# Altium PCB USBC Charger.PcbDoc
Units mil, origin at the board's own origin, x right, y up, seen from the top; angles counter-clockwise.
Board outline 2500 x 800 mil, 2 copper layers (Top Layer, Bottom Layer); 29 components, 18 nets, 133 pads, 42 vias.
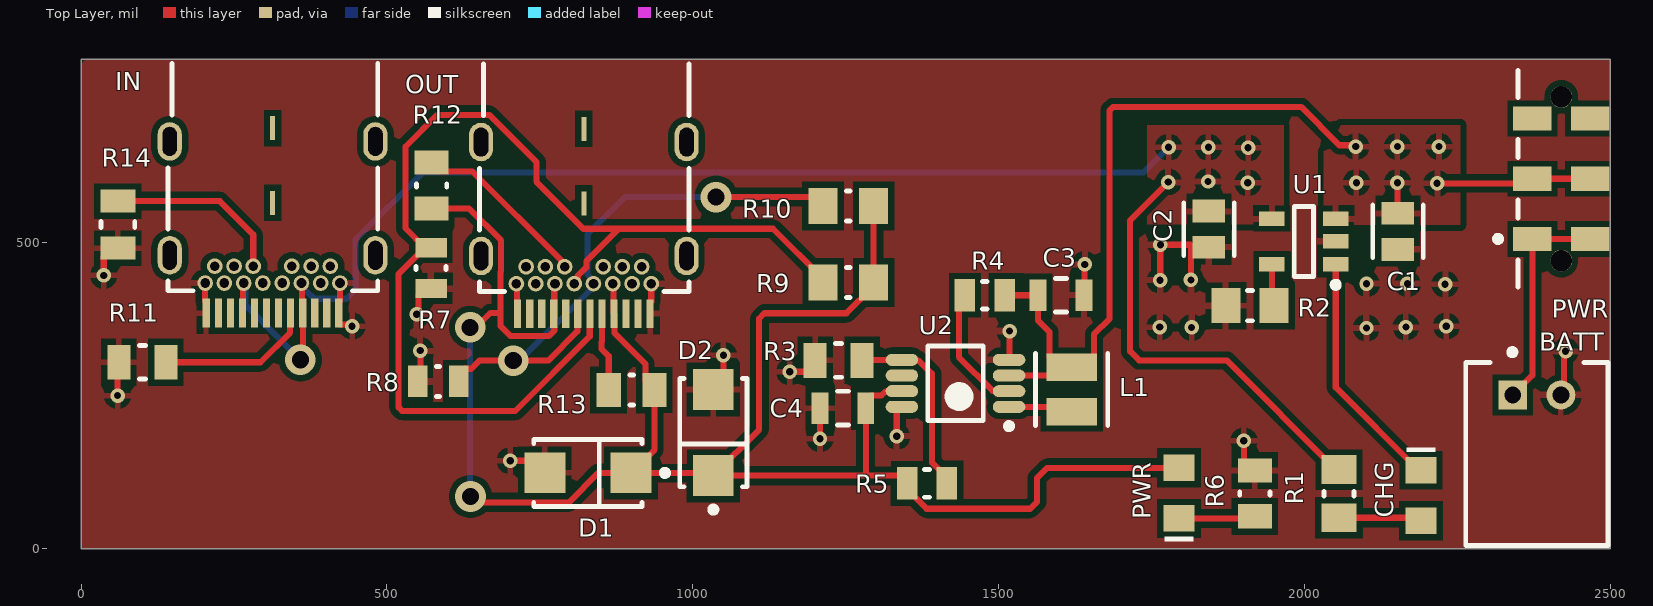
[diagram p0: Top Layer view]
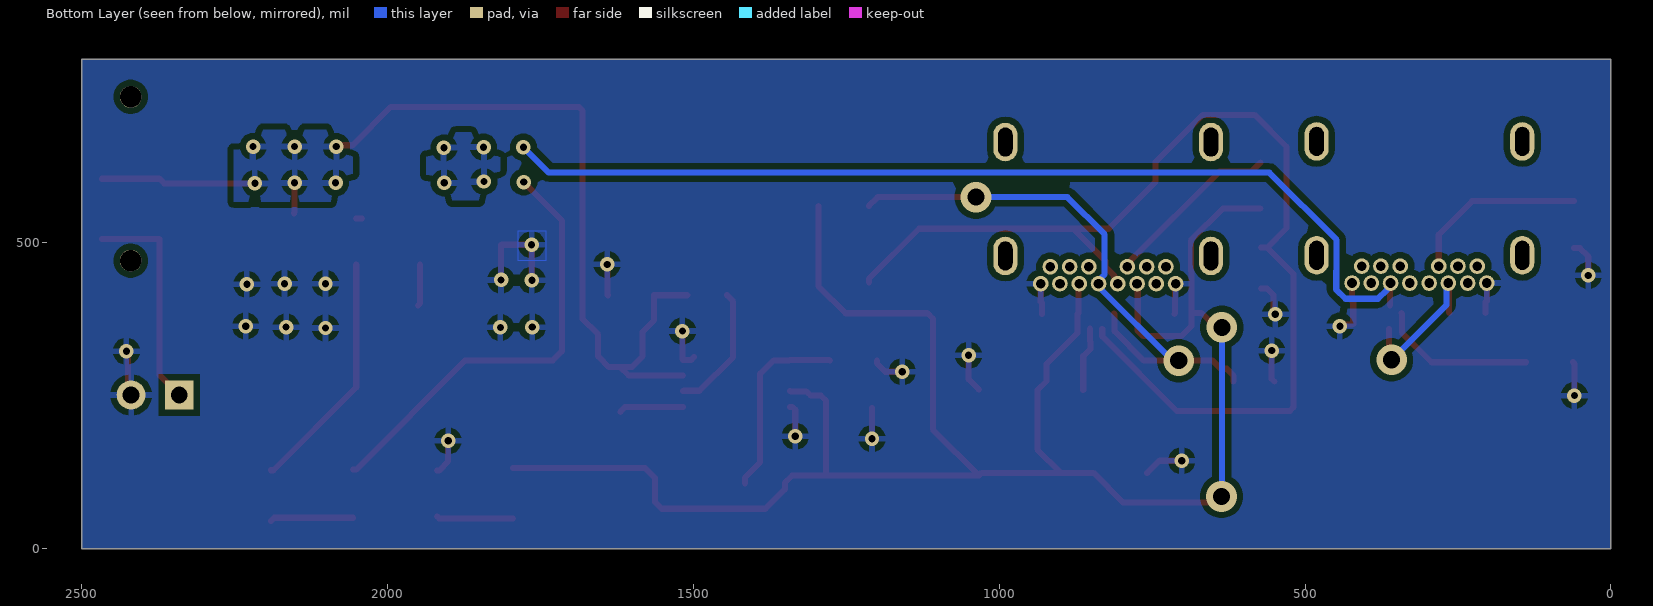
[diagram p1: Bottom Layer view, seen from below]
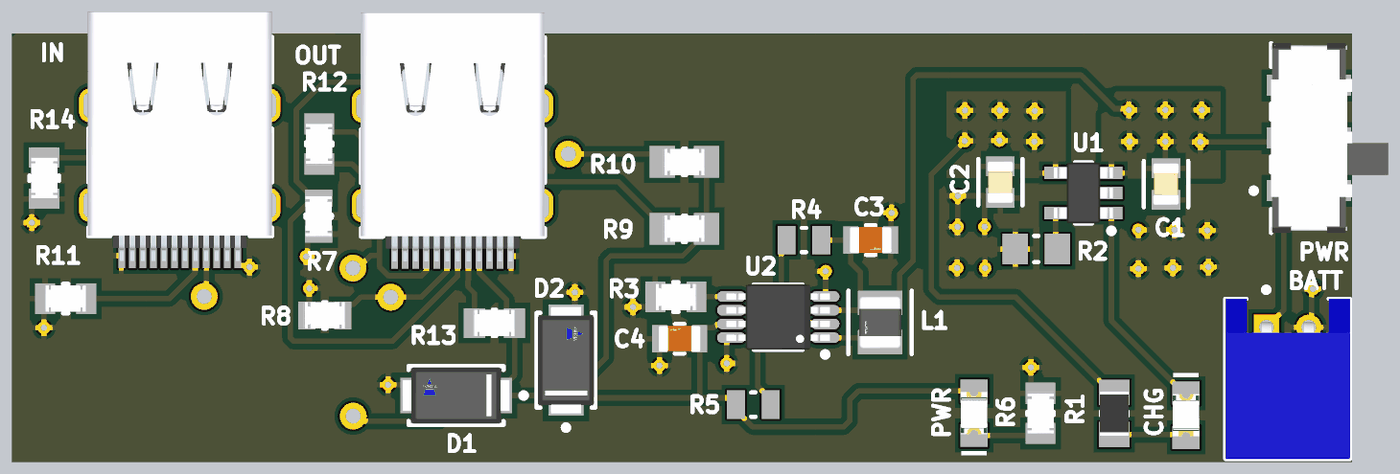
[diagram p2: 3D render of the assembled board from above, using the file's embedded part models]

## Layer stack, top to bottom
Top Solder: solder mask 0.4, Solder Resist, Dk 3.5
Top Layer: signal copper 1.4
Dielectric 1: dielectric 12.6, FR-4, Dk 4.8
Bottom Layer: signal copper 1.4
Bottom Solder: solder mask 0.4, Solder Resist, Dk 3.5

## Board outline
0,0 2500,0 2500,800 0,800

## Design rules (kind name [scope] priority, off if disabled: settings)
Clearance USB_Clearance [IsPad AND (InComponent('IN') OR InComponent('OUT')) vs IsTrack] p1: gap=8 ignorepadtopadclearanceinfootprint=TRUE
Clearance [All] p2: gap=10 ignorepadtopadclearanceinfootprint=TRUE
MinimumSolderMaskSliver [All] p1: minsoldermaskwidth=3.94
PolygonConnect [All] p1: connectstyle=Relief reliefconductorwidth=10 reliefentries=4 polygonreliefangle="90 Angle" airgapwidth=10
RoutingVias [All] p1: holewidth=28 width=50 viastyle="Through Hole" minholewidth=11.81 minwidth=23.62 maxholewidth=28 maxwidth=50
SilkToSolderMaskClearance [IsPad] p1: minsilkscreentomaskgap=5.91 clearancetoexposedcopper=TRUE
SolderMaskExpansion [All] p1: expansion=4 istentingtop=FALSE
SupplyNets "Schematic Supply Nets_1" [InNet('GND')] p1: voltage=0.000
SupplyNets "Schematic Supply Nets" [InNet('+5')] p2: voltage=0.000
Width Width_CC [InNet('CC1_IN') OR InNet('CC2_IN') OR InNet('CC1_OUT') OR InNet('CC2_OUT')] p1: maxlimit=10 minlimit=7 preferedwidth=7
Width [All] p2: maxlimit=10 minlimit=10 preferedwidth=10
Width PowerNets [InNetClass('PowerNets')] p3: maxlimit=50 minlimit=20 preferedwidth=20 minimp=50.000000 maximp=50.000000 favimp=50.000000
28 further rules are at their usual default settings.

## Classes and differential pairs
net class PowerNets: 5VIN +5 NetC1_1 NetJ1_1 NetL1_2
component class "Step-Up DCDC Converter": C3 C4 D1 D2 L1 OUT PWR R3 R4 R5 R6 R7 R8 R9 R10 R12 R13 U2
component class "Charge Controller": BATT C1 C2 CHG IN PWR R1 R2 R11 R14 U1

## Components (designator, comment, footprint, x,y, rotation, side; value= is the part's Value field where it differs from the comment)
BATT "BATT" JST-S2B-PH-K-S_V 2380,155 r0 top (schematic designator J1)
C1 "4.7uF" FP-C0805C475K8PACTU-MFG 2153,519.03 r270 top
C2 "4.7uF" FP-C0805C475K8PACTU-MFG 1844,522.5 r270 top
C3 "22uF" FP-GRM21B-0_15-MFG 1602.1,414.5 r0 top (schematic designator C?)
C4 "22uF" FP-GRM21B-0_15-MFG 1245.5,230 r180 top
CHG "CHG" WL-SMCW_0805_150080xx75000 2190.5,87 r270 top (schematic designator LED1)
D1 "40V/1.5A" FP-95400-MFG 828.5,124 r180 top value=134pF
D2 "40V/1.5A" FP-95400-MFG 1033.5,190 r90 top value=134pF
IN "632723100011" 632723100011 312.89,618.76 r180 top (schematic designator J2)
L1 "2.2uH" FP-LQM2HPN_G0-IPC_C 1619.5,260.5 r270 top
OUT "632723100011" 632723100011 821.89,617.76 r180 top (schematic designator J3)
PWR "PWR" FP-JS102011JAQN-MFG 2420,605 r90 top (schematic designator SW1)
PWR "PWR" WL-SMCW_0805_150080xx75000 1795,91 r90 top (schematic designator LED2)
R1 "1K" RESC2013X60X35ML10T20 2056.5,90.13 r270 top
R2 "2K" RESC2013X60X35ML10T20 1911,397.5 r0 top
R3 "100K" FP-CRCW0805-e3-MFG 1238.5,308 r0 top
R4 "750K" RESC2013X50X30LL20T20 1477.5,414.5 r0 top
R5 "750K" RESC2013X50X30LL20T20 1383,107 r180 top
R6 "4.7K" FP-CRCW0805-e3-IPC_B 1919,90.5 r270 top
R7 "49.9K" FP-CRCW0805-e3-IPC_C 572,459 r90 top
R8 "49.9K" FP-CRCW0805-e3-IPC_C 583.5,273.5 r0 top
R9 "75K" FP-CRCW0805-e3-IPC_A 1254.37,435.5 r0 top
R10 "75K" FP-CRCW0805-e3-IPC_A 1254.37,560.5 r0 top
R11 "5.1K" FP-CRCW0805-e3-MFG 100,305 r0 top
R12 "56K" FP-CRCW0805-e3-IPC_B 573,594 r90 top
R13 "56K" FP-CRCW0805-e3-IPC_B 900,259.5 r180 top
R14 "5.1K" FP-CRCW0805-e3-MFG 60,530 r90 top
U1 "MCP73831" SOT95P280X145-5N 1999,502.5 r180 top
U2 "PAM2401" TSOP65P490X110-8N 1429.5,270.5 r180 top

## Footprints (in the part's own frame and the unit in brackets; to place one, negate y for a bottom-side part, rotate by r counter-clockwise, add the part's x,y. Pads: shape width x height; smd on the part's side, far side on the other; paste and mask are expansions set on the pad)
632723100011 [mm] "USB 3.1 Type C Receptacle Horizontal THR"
  rect 0.3x1.2 smd: A1(-2.75,5.93) A2(-2.25,5.93) A3(-1.75,5.93) A4(-1.25,5.93) A5(-0.75,5.93) A6(-0.25,5.93) A7(0.25,5.93) A8(0.75,5.93) A9(1.25,5.93) A10(1.75,5.93) A11(2.25,5.93) A12(2.75,5.93)
  round 0.65 hole 0.4: B1(2.8,4.68) B2(2.4,3.98) B3(1.6,3.98) B4(1.2,4.68) B5(0.8,3.98) B6(0.4,4.68) B7(-0.4,4.68) B8(-0.8,3.98) B9(-1.2,4.68) B10(-1.6,3.98) B11(-2.4,3.98) B12(-2.8,4.68) Shell(-2,4.68) Shell(2,4.68)
  oval 1x1.6 hole 0.6 slot 1.2 at 90 deg: Shell(-4.27,3.53) Shell(-4.27,-1.2) Shell(4.27,3.53) Shell(4.27,-1.2)
  rect 0.2x1 smd: Shell(0,1.35) Shell(0,-1.75)
  silkscreen extent -4.37,-4.45 4.34,5, body extent -4.37,-5.62 4.37,6.2, height 3.05
FP-95400-MFG [mm]
  rect 1.7x1.68 smd paste+0 mask+0: 1(-1.79,0) 2(1.79,0)
  silkscreen extent -3.33,-1.4 2.25,1.4, body extent -2.74,-1.5 2.74,1.5, height 0.25
FP-C0805C475K8PACTU-MFG [mm]
  rect 0.95x1.35 smd paste+0 mask+0: 1(-0.75,0) 2(0.75,0)
  silkscreen extent -1.1,-1.05 1.1,1.05, body extent -1.4,-0.85 1.4,0.85, height 0.25
FP-CRCW0805-e3-IPC_A [mil]
  rect 47.5x59.38 smd paste+0 mask+0: 1(-41.37,0) 2(41.37,0)
  silkscreen extent -3,-25 3,25, body extent -85,-49 85,49, height 10
FP-CRCW0805-e3-IPC_B [mil]
  rect 39.63x55.44 smd paste+0 mask+0: 1(-37.44,0) 2(37.44,0)
  silkscreen extent -3,-25 3,25, body extent -67,-38 67,38, height 10
FP-CRCW0805-e3-IPC_C [mil]
  rect 31.75x51.5 smd paste+0 mask+0: 1(-33.5,0) 2(33.5,0)
  silkscreen extent -3,-25 3,25, body extent -53,-31 53,31, height 10
FP-CRCW0805-e3-MFG [mm]
  rect 0.95x1.45 smd paste+0 mask+0: 1(-0.975,0) 2(0.975,0)
  silkscreen extent -0.13,-0.7 0.13,0.7, body extent -1.55,-0.82 1.55,0.82, height 0.25
FP-GRM21B-0_15-MFG [mm]
  rect 0.7x1.3 smd paste+0 mask+0: 1(-0.95,0) 2(0.95,0)
  silkscreen extent -0.23,-0.7 0.23,0.7, body extent -1.4,-0.8 1.4,0.8, height 0.25
FP-JS102011JAQN-MFG [mm]
  rect 1x1.6 smd paste+0 mask+0: 1(-2.5,-1.2) 1(-2.5,1.2) 2(0,1.2) 2(0,-1.2) 3(2.5,-1.2) 3(2.5,1.2)
  round 0.9 hole 0.9 unplated paste-2539.97 mask+0: ""(-3.4,0) ""(3.4,0)
  silkscreen extent -4.5,1.8 4.5,2.75, body extent -4.6,-3.9 4.6,2.1, height 0.25
FP-LQM2HPN_G0-IPC_C [mil]
  rect 45.47x82.92 smd paste+0 mask+0: 1(-36.44,0) 2(36.44,0)
  silkscreen extent -59,-59 59,59, body extent -63,-47 63,47, height 10
JST-S2B-PH-K-S_V [mm] "THD, 2-Leads, Body 7.6x5.9mm, Pitch 2mm"
  rect 1.2x1.2 hole 0.7: 1(-1,2.45)
  round 1.2 hole 0.7: 2(1,2.45)
  silkscreen extent -2.95,-3.8 2.95,4.35, body extent -2.95,-3.8 2.95,3.8, height 4.8
RESC2013X50X30LL20T20 [mm] "Chip Resistor, 2-Leads, Body 2.00x1.25mm, IPC High Density"
  rect 0.85x1.35 smd: 1(-0.825,0) 2(0.825,0)
  silkscreen extent -0.1,-0.58 0.1,0.58, body extent -1.1,-0.72 1.1,0.72, height 0.5
RESC2013X60X35ML10T20 [mm] "Chip Resistor, 2-Leads, Body 2.1x1.35mm, IPC Low Density"
  rect 1.2x1.45 smd: 1(-1,0) 2(1,0)
  silkscreen extent -0.1,-0.63 0.1,0.63, body extent -1.05,-0.68 1.05,0.67, height 0.6
SOT95P280X145-5N [mm] "SOT23, 5-Leads, Body 2.90x2.80mm, Pitch 0.95mm, IPC Medium Density"
  rect 1.05x0.6 smd: 1(-1.325,0.95) 2(-1.325,0) 3(-1.325,-0.95) 4(1.325,-0.95) 5(1.325,0.95)
  silkscreen extent -1.45,-1.45 0.4,1.92, body extent -1.4,-1.45 1.4,1.45, height 1.45
TSOP65P490X110-8N [mm] "TSOP, 8-Leads, Body 3.00x3.00mm, Pitch 0.65mm, IPC Medium Density"
  oval 1.35x0.5 smd: 1(-2.225,0.975) 2(-2.225,0.325) 3(-2.225,-0.325) 4(-2.225,-0.975) 5(2.225,-0.975) 6(2.225,-0.325) 7(2.225,0.325) 8(2.225,0.975)
  silkscreen extent -2.35,-1.55 1.15,1.9, body extent -2.45,-1.55 2.45,1.55, height 1.1
WL-SMCW_0805_150080xx75000 [mm] "SMD Mono-color Chip LED, body 2.0x1.25mm"
  rect 1.1x1.3 smd: 1(-1.05,0) 2(1.05,0)
  silkscreen extent -2,-0.6 -1.8,0.6, body extent -1,-0.63 1,0.62, height 0.7

## Part data
BATT: library part CMP-1755-00004-1, "Male Header, Pitch 2 mm, 1 x 2 Position, Height 4.8 mm, Tail Length 3.4 mm, -25 to 85 degC, RoHS, Bulk", Capacitance="10 uF", Case\Package=Radial, Max Operating Temperature="85 degC", Min Operating Temperature="-40 degC", Package Quantity=200, Tolerance=20%, Voltage Rating="50 V", ComponentLink1Description=Datasheet, ComponentLink1URL=http://www.jst-mfg.com/product/pdf/eng/ePH.pdf, DatasheetVersion=Dec-12, Diameter="5 mm", Height="11 mm", Lead Pitch="2 mm", Length="11 mm", Mount="Through Hole", PackageDescription="Male Header, Pitch 2 mm, 1 x 2 Position, Height 4.8 mm, Tail Length 3.4 mm", PackageReference=S2B-PH-K-S, Packaging=Bulk, Pins=2, Radiation Hardening=No, REACH SVHC="No SVHC", RoHSCompliant=true, Voltage Rating (DC)="50 V"
C1 C2: library part CMP-2007-01007-2, "CAP CER 4.7UF 10V X5R 0805", Case Code (Imperial)=0805, Case Code (Metric)=2012, Dielectric=X5R, Dielectric Material=Ceramic, Max Operating Temperature=85°C, Min Operating Temperature=-55°C, Package Quantity=1, Tolerance=10%, Voltage=10V, Capacitance=4.7uF, Case/Package=0805, Construction=Flat, Depth=1.25mm, Dissipation Factor=5%, Height=1.25mm, Lead Free="Lead Free", Lead Pitch=0.75mm, Length=2mm, Mount="Surface Mount", Number of Pins=2, Packaging="Tape and Reel", Radiation Hardening=No, REACH SVHC="No SVHC", RoHS Compliant=Yes, Series=C, Termination=SMD/SMT, Thickness=0.055inch, Voltage Rating=10V, Voltage Rating (DC)=10V, Width=1.2mm
C3 C4: library part CMP-2007-03385-2, "Chip Multilayer Ceramic Capacitors for General Purpose, 0805, 22uF, X5R, 15%, 20%, 6.3V", Case Code (Imperial)=0805, Case Code (Metric)=2012, Dielectric=X5R, Max Operating Temperature=85°C, Min Operating Temperature=-55°C, Package Quantity=1, Tolerance=20%, Voltage=6.3V, Capacitance=22uF, Case/Package=0805, Depth=1.25mm, Height=1.25mm, Lead Free="Lead Free", Length=2mm, Material=Ceramic, Mount="Surface Mount", Packaging="Tape and Reel", Radiation Hardening=No, REACH SVHC="No SVHC", Termination=SMD/SMT, Thickness=0.053inch, Voltage Rating=6.3V, Voltage Rating (DC)=6.3V, Width=0.049inch
CHG: library part CMP-1426-00011-4, "LED Uni-Color Red 630nm 2-Pin Chip 0805(2012Metric) T/R", Case Code (Imperial)=0805, Case Code (Metric)=2012, Color=Red, Forward Current=100mA, Forward Voltage=2V, Manufacturer Lifecycle Status=ACTIVE, Manufacturer Package Identifier="0805 (2012 metric)", Max Junction Temperature (Tj)=95°C, Max Operating Temperature=85°C, Max Reverse Voltage (DC)=5V, Min Operating Temperature=-40°C, Power Dissipation=72mW, Test Current=20mA, Case/Package=0805, Dominant Wavelength=625nm, Height=700µm, Length=2mm, Lens Style="Clear, Rectangular", Lifecycle Status=Production, Luminous Intensity=150mcd, Mount="Surface Mount", Packaging="Tape and Reel", Peak Wavelength=630nm, REACH SVHC=Unknown, RoHS=Compliant, Viewing Angle=140°, Wavelength=625nm, Width=1.25mm, YEOL="1 = Estimated lifetime > 10 years"
D1 D2: library part CMP-02539-000025-1, "DIODE SCHOTTKY 40V 1.5A SMA", Capacitance=134pF, Forward Current=1.5A, Manufacturer=Vishay, Manufacturer Part Number=VS-15MQ040NTRPBF, Max Junction Temp=+150°C, Max Repetitive Reverse Voltage=40V, Max Surge Forward Current=140A, Package=95400, Peak Reverse Current=0.5mA, Temperature="-40°C to +150°C", Temperature Range Low=-40°C, Automotive=No, Category=Diode, ComponentLink2Description=Datasheet, ComponentLink2URL=http://www.vishay.com/docs/94141/vs-15mq040ntrpbf.pdf, Device Class L1="Discrete Semiconductors", Device Class L2=Diodes, Device Class L3="Schottky Diodes", Digikey Description="DIODE SCHOTTKY 40V 1.5A SMA", Footprint Url=http://www.vishay.com/docs/95400/sma.pdf, Height=2.29mm, Lead Free=Yes, Mouser Description="Schottky Diodes & Rectifiers 2.1 Amp 40 Volt", Octopart=https://octopart.com/vs-15mq040ntrpbf-vishay-44340959, Reverse Voltage=40V, RoHS=TRUE, Standoff Height=0mm, Temperature Range High=+150°C
IN OUT: library part CMP-1502-03213-4, "USB Connector, 24 Contact(s), Female, Right Angle, Solder and Surface Mount Terminal, Receptacle", Contact Resistance=30mΩ, Current Rating=5A, Insulation Resistance=1GΩ, Max Operating Temperature=105°C, Min Operating Temperature=-40°C, Voltage Rating=20V, Connector Type=USB, Contact Material="Gold, Nickel", Gender=Receptacle, Height=3.16mm, Mount="Surface Mount, Through Hole", Number of Contacts=24, Number of Pins=24, Orientation=Horizontal, Packaging="Tape and Reel", Pin Length=1.5mm, RoHS=Compliant, USB Standard="USB 3.1"
L1: library part CMP-06042-017002-1, "Multilayer Type Inductor for Power Lines, 1008 (2520), 2.2μH, 20%, 0.225Ω, 1100mA", Case/Package=1008, Current Rating=1.1A, DC Resistance (DCR)=225mR, Max Operating Temperature=85°C, Min Operating Temperature=-40°C, Package Quantity=3000, Self Resonant Frequency=40MHz, Test Frequency=1MHz, Tolerance=20%, Height - Seated (Max)=0.039inch, Inductance=2.2uH, Length=0.098inch, Mount="Surface Mount", Packaging="Tape and Reel", RoHS Compliant=Yes, Shielding=Shielded, Width=0.079inch
PWR: library part CMP-10038-000001-1, "SWITCH SLIDE SPDT 300MA 6V", Contact Current Rating=300mA, Contact Resistance=70mΩ, Manufacturer=C&K, Manufacturer Part Number=JS102011JAQN, Temperature="-40°C to +85°C", Temperature Range High=+85°C, Temperature Range Low=-40°C, Voltage Rating Dc=6V, Automotive=No, Category=Switch, ComponentLink2Description=Datasheet, ComponentLink2URL=https://www.ckswitches.com/media/1422/js.pdf, Device Class L1=Electromechanical, Device Class L2=Switches, Device Class L3="Slide Switches", Digikey Description="SWITCH SLIDE SPDT 300MA 6V", Electromechanical Life=5000Cycles, Height=3.5mm, Lead Free=Yes, Mount="Surface Mount", Mouser Description="JS Series Sub-Miniature Slide Switch SPDT Right-Angle SMT", Octopart=https://octopart.com/js102011jaqn-c%26k+components-74831566, Package=JS102011JAQN, RoHS=TRUE, Throw Configuration=SPDT
PWR: library part CMP-1426-00008-8, "Led, Blue, 470 Nm, 3.2 V, 30 Ma, 145 Mcd Rohs Compliant: Yes", Case Code (Imperial)=0805, Case Code (Metric)=2012, Color=Blue, Forward Current=100mA, Forward Voltage=3.2V, Manufacturer Lifecycle Status=ACTIVE, Manufacturer Package Identifier="0805 (2012 metric)", Max Junction Temperature (Tj)=95°C, Max Operating Temperature=85°C, Max Reverse Voltage (DC)=5V, Min Operating Temperature=-40°C, Power Dissipation=105mW, Test Current=20mA, Case/Package=0805, Dominant Wavelength=470nm, Height=700µm, Lead Free="Lead Free", Length=2mm, Lens Style="Clear, Rectangular", Lifecycle Status=Production, Luminous Intensity=145mcd, Mount="Surface Mount", Packaging="Tape and Reel", Peak Wavelength=465nm, REACH SVHC=Unknown, Reverse Voltage=5V, RoHS=Compliant, Viewing Angle=140°, Wavelength=470nm, Width=1.25mm, YEOL="1 = Estimated lifetime > 10 years"
R1: library part CMP-2100-03671-1, "Chip Resistor, 1 KOhm, +/- 1%, 125 mW, -55 to 155 degC, 0805 (2012 Metric), RoHS, Tape and Reel", Case Code (Imperial)=0805, Case Code (Metric)=2012, Manufacturer=Yageo, Max Operating Temperature=155degC, Max Power Dissipation=125mW, Min Operating Temperature=-55degC, Package Description="2-Pin Surface Mounted Device, Body 2 x 1.25 mm", Package Quantity=1, Resistance=1KOhm, Temperature Coefficient=100ppm/degreesC, Tolerance=1%, Voltage Rating=150V, Case/Package=0805, Composition=ThickFilm, Datasheet URL=http://www.yageo.com/NewPortal/yageodocoutput?fileName=/pdf/R-Chip/PYu-RC_Group_51_RoHS_L_5.pdf, Datasheet Version="Rev. 5, 10/2016", Depth=1.25mm, Height=0.024inch, Lead Free=LeadFree, Length=0.079inch, Manufacturer URL=http://www.yageo.com/, Military Standard=Not, Number of Pins=2, Number of Terminations=2, Package Reference=0805, Packaging=TapeandReel, Power Rating=125mW, REACH SVHC=Unknown, RoHSCompliant=true, Termination=SMD/SMT, Voltage Rating (DC)=150V, Width=0.049inch
R2: library part CMP-2001-01361-1, Manufacturer=Yageo, Part Number=RC0805JR-072KL
R3: library part CMP-2001-04899-2, "RES Thick Film, 100kΩ, 1%, 0.125W, 100ppm/°C, 0805", Case Code (Imperial)=0805, Case Code (Metric)=2012, Max Operating Temperature=155°C, Min Operating Temperature=-55°C, Package Quantity=5000, Power Rating=125mW, Resistance=100kR, Temperature Coefficient=100ppm/°C, Tolerance=1%, Voltage Rating=150V, Case/Package=0805, Composition="Thick Film", Contact Plating=Tin, Depth=1.25mm, Height=0.45mm, Lead Free="Lead Free", Length=2mm, Military Standard=Not, Mount="Surface Mount", Number of Pins=2, Packaging="Tape and Reel", Radiation Hardening=No, Termination=SMD/SMT, Voltage Rating (DC)=150V, Weight=0.000194oz, Width=1.25mm
R4 R5: library part CMP-2001-04102-1, Manufacturer="Vishay Dale", Part Number=CRCW0805750KFKEA
R6: library part CMP-2100-03615-2, "RES Thick Film, 4.7kΩ, 1%, 0.125W, 100ppm/°C, 0805", Case Code (Imperial)=0805, Case Code (Metric)=2012, Max Operating Temperature=155°C, Max Power Dissipation=125mW, Min Operating Temperature=-55°C, Package Quantity=10, Resistance=4.7kR, Temperature Coefficient=100ppm/°C, Tolerance=1%, Voltage Rating=150V, Case/Package=0805, Composition="Thick Film", Contact Plating=Tin, Depth=1.25mm, Features="Automotive AEC-Q200", Height=0.45mm, Lead Free="Lead Free", Length=2mm, Military Standard=Not, Number of Terminations=2, Packaging="Tape and Reel", Power Rating=125mW, Radiation Hardening=No, Termination=SMD/SMT, Voltage Rating (DC)=150V, Weight=0.000194oz, Width=1.25mm
R7 R8: library part CMP-2001-03952-2, "RES Thick Film, 49.9kΩ, 1%, 0.125W, 100ppm/°C, 0805", Case Code (Imperial)=0805, Case Code (Metric)=2012, Max Operating Temperature=155°C, Max Power Dissipation=125mW, Min Operating Temperature=-55°C, Package Quantity=10, Resistance=49.9kR, Temperature Coefficient=100ppm/°C, Tolerance=1%, Voltage Rating=150V, Case/Package=0805, Composition="Thick Film", Contact Plating=Tin, Depth=1.25mm, Features="Automotive AEC-Q200", Height=0.45mm, Lead Free="Lead Free", Length=2mm, Military Standard=Not, Mount="Surface Mount", Number of Terminations=2, Packaging="Tape and Reel", Power Rating=125mW, Radiation Hardening=No, Termination=SMD/SMT, Voltage Rating (DC)=150V, Weight=0.000194oz, Width=0.049inch
R9 R10: library part CMP-2001-04106-2, "RES Thick Film, 75kΩ, 1%, 0.125W, 100ppm/°C, 0805", Case Code (Imperial)=0805, Case Code (Metric)=2012, Max Operating Temperature=155°C, Max Power Dissipation=125mW, Min Operating Temperature=-55°C, Package Quantity=10, Resistance=75kR, Resistance Tolerance=1%, Resistor Type="Thick Film", Temperature Coefficient=100ppm/°C, Voltage Rating=150V, Case/Package=0805, Construction=Rectangular, Contact Plating=Tin, Depth=1.25mm, Features="Automotive AEC-Q200", Height=0.45mm, Lead Free="Lead Free", Length=2mm, Military Standard=Not, Mount="Surface Mount", Number of Pins=2, Number of Terminations=2, Packaging="Tape and Reel", Power Rating=125mW, Radiation Hardening=No, RoHS Compliant=Yes, Series=CRCW, Technology="THICK FILM", Termination=SMD/SMT, Tolerance=1%, Voltage Rating (DC)=150V, Weight=0.000194oz, Width=0.049inch, Working Voltage=150V
R11 R14: library part CMP-2001-04024-2, "RES Thick Film, 5.1kΩ, 1%, 0.125W, 100ppm/°C, 0805", Case Code (Imperial)=0805, Case Code (Metric)=2012, Max Operating Temperature=155°C, Max Power Dissipation=125mW, Min Operating Temperature=-55°C, Package Quantity=10, Resistance=5.1kR, Temperature Coefficient=100ppm/°C, Tolerance=1%, Voltage Rating=150V, Case/Package=0805, Composition="Thick Film", Contact Plating=Tin, Depth=1.25mm, Features="Automotive AEC-Q200", Height=0.45mm, Lead Free="Lead Free", Length=2mm, Military Standard=Not, Mount="Surface Mount", Number of Terminations=2, Packaging="Tape and Reel", Power Rating=125mW, Radiation Hardening=No, Termination=SMD/SMT, Voltage Rating (DC)=150V, Weight=0.000194oz, Width=0.049inch
R12 R13: library part CMP-2001-04015-2, "RES Thick Film, 56kΩ, 1%, 0.125W, 100ppm/°C, 0805", Case Code (Imperial)=0805, Case Code (Metric)=2012, Max Operating Temperature=155°C, Max Power Dissipation=125mW, Min Operating Temperature=-55°C, Package Quantity=10, Resistance=56kR, Temperature Coefficient=100ppm/°C, Tolerance=1%, Voltage Rating=150V, Case/Package=0805, Composition="Thick Film", Contact Plating=Tin, Depth=1.25mm, Features="Automotive AEC-Q200", Height=0.45mm, Lead Free="Lead Free", Length=2mm, Military Standard=Not, Mount="Surface Mount", Number of Pins=2, Number of Terminations=2, Packaging="Tape and Reel", Power Rating=125mW, Radiation Hardening=No, Termination=SMD/SMT, Voltage Rating (DC)=150V, Weight=0.000194oz, Width=1.25mm
U1: "MCP73831 Series Single-Cell Li-Ion/Li-Polymer Battery Charge Controller SOT-23-5", Ambient Temperature Range High=85°C, Case/Package=SOT-23, Drain to Source Resistance=350mΩ, Manufacturer=Microchip, Manufacturer Lifecycle Status=REL, Manufacturer Part Number=MCP73831T-2ACI/OT, Max Charge Current=500mA, Max Junction Temperature (Tj)=125°C, Max Output Voltage=4.5V, Max Power Dissipation=1.54W, Max Supply Voltage=6V, Min Operating Temperature=-40°C, Min Output Voltage=4.168V, Min Supply Voltage=3.75V, Output Voltage=4.2V, Voltage Rating=4.534V, Category="Battery Management", ComponentLink1Description=https://datasheet.octopart.com:443/MCP73831T-2ACI-OT-Microchip-datasheet-8814540.pdf?src-supplier=element14+APAC, ComponentLink1URL=https://datasheet.octopart.com:443/MCP73831T-2ACI-OT-Microchip-datasheet-8814540.pdf?src-supplier=element14+APAC, ComponentLink2Description=https://datasheet.octopart.com:443/MCP73831T-2ACI-OT-Microchip-datasheet-145017548.pdf?src-supplier=Microchip, ComponentLink2URL=https://datasheet.octopart.com:443/MCP73831T-2ACI-OT-Microchip-datasheet-145017548.pdf?src-supplier=Microchip, ComponentLink3Description=https://datasheet.octopart.com:443/MCP73831T-2ACI-OT-Microchip-datasheet-34193478.pdf?src-supplier=Farnell, ComponentLink3URL=https://datasheet.octopart.com:443/MCP73831T-2ACI-OT-Microchip-datasheet-34193478.pdf?src-supplier=Farnell, ComponentLink4Description=https://datasheet.octopart.com:443/MCP73831T-2ACI-OT-Microchip-datasheet-16123459.pdf?src-supplier=LKR, ComponentLink4URL=https://datasheet.octopart.com:443/MCP73831T-2ACI-OT-Microchip-datasheet-16123459.pdf?src-supplier=LKR, ComponentLink5Description=https://datasheet.octopart.com:443/MCP73831T-2ACI-OT-Microchip-datasheet-142675560.pdf?src-supplier=TME, ComponentLink5URL=https://datasheet.octopart.com:443/MCP73831T-2ACI-OT-Microchip-datasheet-142675560.pdf?src-supplier=TME, ComponentLink6Description=https://datasheet.octopart.com:443/MCP73831T-2ACI-OT-Microchip-datasheet-158592061.pdf?src-supplier=SHENGYU+ELECTRONICS, ComponentLink6URL=https://datasheet.octopart.com:443/MCP73831T-2ACI-OT-Microchip-datasheet-158592061.pdf?src-supplier=SHENGYU+ELECTRONICS, ComponentLink7Description=https://datasheet.octopart.com/MCP73831T-2ACI-OT-Microchip-datasheet-16593012.pdf, ComponentLink7URL=https://datasheet.octopart.com/MCP73831T-2ACI-OT-Microchip-datasheet-16593012.pdf, ComponentLink8Description=https://datasheet.octopart.com:443/MCP73831T-2ACI-OT-Microchip-datasheet-7127743.pdf?src-supplier=Newark, ComponentLink8URL=https://datasheet.octopart.com:443/MCP73831T-2ACI-OT-Microchip-datasheet-7127743.pdf?src-supplier=Newark, ComponentLink9Description=https://datasheet.octopart.com:443/MCP73831T-2ACIOT-Microchip-datasheet-39874.pdf?src-supplier=RS+(Formerly+Allied+Electronics), ComponentLink9URL=https://datasheet.octopart.com:443/MCP73831T-2ACIOT-Microchip-datasheet-39874.pdf?src-supplier=RS+(Formerly+Allied+Electronics), ComponentLink10Description=http://sigma.octopart.com:80/188449423/materials_sheet/Microchip-MCP73831T-2ACI-OT.pdf?src-supplier=Compliance+Statements, ComponentLink10URL=http://sigma.octopart.com:80/188449423/materials_sheet/Microchip-MCP73831T-2ACI-OT.pdf?src-supplier=Compliance+Statements, ComponentLink11Description=http://sigma.octopart.com:80/192856963/materials_sheet/Microchip-MCP73831T-2ACI-OT.pdf?src-supplier=Compliance+Statements, ComponentLink11URL=http://sigma.octopart.com:80/192856963/materials_sheet/Microchip-MCP73831T-2ACI-OT.pdf?src-supplier=Compliance+Statements, ComponentLink12Description=http://sigma.octopart.com:80/rohs_statement/Microchip-company-71.pdf?src-supplier=Compliance+Statements, ComponentLink12URL=http://sigma.octopart.com:80/rohs_statement/Microchip-company-71.pdf?src-supplier=Compliance+Statements, ComponentLink13Description=http://sigma.octopart.com:80/reach_statement/Microchip-company-70.pdf?src-supplier=Compliance+Statements, ComponentLink13URL=http://sigma.octopart.com:80/reach_statement/Microchip-company-70.pdf?src-supplier=Compliance+Statements, ComponentLink14Description=http://sigma.octopart.com:80/conflict_mineral_statement/Microchip-company-69.pdf?src-supplier=Compliance+Statements, ComponentLink14URL=http://sigma.octopart.com:80/conflict_mineral_statement/Microchip-company-69.pdf?src-supplier=Compliance+Statements, ComponentLink15Description=http://sigma.octopart.com:80/conflict_mineral_statement/Microchip-company-68.pdf?src-supplier=Compliance+Statements, ComponentLink15URL=http://sigma.octopart.com:80/conflict_mineral_statement/Microchip-company-68.pdf?src-supplier=Compliance+Statements, Contact Plating=Tin, Country of Assembly=Thailand, Country of Fabrication="United States of America", Country of Origin=Thailand, Export Control Classification Number (ECCN) Code=EAR99, Harmonized Tariff Schedule (HTS) Code=8542.39.0060, Height=1.45mm, HS Code=8542.39.0090, Introduction Date=2005-11-03, Length=3.0988mm, Lifecycle Status=Production, Max Operating Temperature=85°C, Mounting Technology="Surface Mount", Nominal Supply Voltage=6V, Number of Cells=1, Number of Channels=1, Number of Outputs=1, Output Current=500mA, Packaging="Cut Tape", Pins=5, Pricing="3000=0.66216, 6000=0.64901, 12000=0.63969, 24000=0.63063, 48000=0.6125 (USD)", Projected EOL Date=2034-11-03, Radiation Hardening=No, REACH SVHC=Unaffected, RoHS=Compliant, Schedule B="8542390000, 8542390000|8542390000|8542390000|8542390000|8542390000", Stock=21000, Supplier=Avnet, Supplier Part Number=MCP73831T-2ACI/OT, Termination=SMD/SMT, Weight=200.998119mg, Width=1.8034mm
U2: "1.0MHz STEP-UP DC-DC CONVERTER"

## Via types
v1: diameter 23.62, hole 11.81, Top Layer to Bottom Layer, 37 vias
v2: diameter 50, hole 28, Top Layer to Bottom Layer, 5 vias

## Nets (pads, with @x,y where several pads share a name; then routed paths per layer and width w, separated by ;. In a path a pad name is that pad's centre, name@x,y a point inside that pad or via, vN(x,y) a via of type N, cw(c..) or ccw(c..) an arc to the next point about the centre after c; other vN are vias at no path point)
5VIN: C2.1 IN.A4 IN.A9 IN.B4 IN.B9 R1.1 U1.4 | length 2610.4
  Top Layer w10: IN.A9 264.46,386.07 264.46,433.31 IN.B4 ; v2(358.5,309) 362.88,313.38 362.88,359.5 ; IN.B9 361.32,433.32 IN.A4@361.32,397.5 ; v1(1777.5,599.5) 1715,537 1715,323 1730,308 1873.08,308 2051.58,129.5 R1.1
  Bottom Layer w10: IN.B4 268.63,431.52 268.63,398.87 v2(358.5,309) ; IN.B9 360.13,430.29 365.83,424.58 365.83,423.82 380.95,408.71 433.81,408.71 448.92,423.82 448.92,453.82 448.31,454.43 448.31,505.13 558.19,615 1736.5,615 v1(1778,656.5)
  other v1: 1907.5,598.5 1842.5,600.5 1843,656.5 1908,655.5
+5: C4.1 D1.1 D2.1 OUT.A4 OUT.A9 OUT.B4 OUT.B9 PWR.2@1795,132.34 R5.2 R9.2 R10.2 R12.1 R13.1 U2.7 | length 3220.9
  Top Layer w10: R12.1 634.03,556.56 686.46,504.13 686.46,453.43 685.86,452.82 685.86,385.5 ; v2(636,362) 645.57,362 669.07,385.5 685.86,385.5 ; v2(636.5,85.5) 647.32,85.5 656.89,75.93 797.71,75.93 845.78,124 D1.1 D1.1@899.37,124 ; OUT.B4 773.46,432.31 773.46,356.84 764.28,347.67 702.33,347.67 685.86,364.14 685.86,385.5 ; OUT.B9 870.32,432.32 870.32,385.07 OUT.A4 871.88,383.51 871.88,352.96 922.62,302.22 922.62,274.31 R13.1 937.44,162.07 D1.1@899.37,124 ; R10.2 R9.2 1295.74,429.56 1251.22,385.03 1117.03,385.03 1108.5,376.5 1108.5,194.92 1033.5,119.92 D2.1 ; U2.7 1341.15,256.96 1314.88,256.96 1308.51,250.59 1291.68,250.59 1282.9,241.81 C4.1 1282.9,121.12 1284.5,119.52 ; PWR.2@1795,132.34 1579.43,132.34 1563.02,115.93 1563.02,76.86 1551.58,65.43 1382.25,65.43 1350.52,97.16 R5.2 1350.52,107.79 1338.79,119.52 1284.5,119.52 ; D1.1@899.37,124 1029.02,124 D2.1 ; D2.1 1284.5,119.52
  Bottom Layer w10: v2(636,362) 636,95.5 636.5,95 v2(636.5,85.5)
CC1_IN: IN.A5 R11.2 | length 255.5
  Top Layer w10: R11.2 293.18,305 341.64,353.46 341.64,384.51 IN.A5
CC1_OUT: OUT.A5 R13.2 | length 105.8
  Top Layer w10: 851.5,360 851.5,338.95 850.64,338.09 850.64,327.07 862.56,315.15 R13.2
CC2_IN: IN.B5 R14.2 | length 295.6
  Top Layer w10: R14.2 226.61,568.39 281.39,513.61 IN.B5
CC2_OUT: OUT.B5 R12.2 | length 290.9
  Top Layer w10: R12.2 587.81,616.62 639.82,616.62 784.69,471.75 784.69,470.98 790.39,465.28 OUT.B5
D+: OUT.A6 OUT.B6 R7.2 R9.1 | length 1805
  Top Layer w10: R7.2 R7.2@562.12,492.5 ; OUT.B6 806.14,437.72 811.84,443.42 811.84,446.03 825.91,460.1 825.91,470.07 879.12,523.28 ; 831.5,359.5 831.5,347.23 709.53,225.27 524.98,225.27 519.13,231.13 519.13,449.5 R7.2@562.12,492.5 ; R9.1 1213,441.44 1131.16,523.28 879.12,523.28 ; R7.2@562.12,492.5 530.28,524.34 530.28,657.46 582.31,709.5 667.32,709.5 744.27,632.55 744.27,600.22 821.21,523.28 879.12,523.28
D-: OUT.A7 OUT.B7 R8.2 R10.1 | length 950.8
  Top Layer w10: R8.2 617,283.38 627.87,294.25 637.75,294.25 651.17,307.67 v2(706.5,307.67) 763.65,307.67 811.27,355.28 811.27,383.51 OUT.A7 ; v2(1038,575) 1198.5,575 R10.1
  Bottom Layer w10: v2(706.5,307.67) 710.33,311.5 720.62,311.5 831.94,422.82 831.94,423.58 837.64,429.29 OUT.B7 837.64,437.72 831.94,443.42 831.94,444.19 827.59,448.54 827.59,514.09 888.5,575 v2(1038,575)
GND: BATT.2 C1.2 C2.2 C3.2 C4.2 D1.2 D2.2 IN.A1 IN.A12 IN.B1 IN.B12 OUT.A1 OUT.A12 OUT.B1 OUT.B12 R2.1 R3.1 R6.1 R7.1 R8.1 R11.1 R14.1 U1.2 U2.4 U2.8 | length 1169.2
  Top Layer w10: v1@37,440.5 37,477.91 50.7,491.61 R14.1 ; v1@59.5,254 59.5,302.89 R11.1 ; IN.B1 202.65,404.98 204.62,403.01 IN.A12 ; IN.B12 423.13,404.98 421.16,403.01 IN.A1 421.16,367.57 422.06,366.67 436.64,366.67 439.31,364 v1(443,364) ; v1(548.5,383.5) 548.5,387.19 551.25,389.93 551.25,414.63 562.12,425.5 R7.1 ; R8.1 554.5,278 v1(554.5,324) ; v1(701.5,144) 738.03,144 D1.2 ; OUT.B1 712.72,432.44 712.72,385.2 OUT.A12 ; OUT.A1 930.16,402.01 932.13,403.98 OUT.B12 ; D2.2 1050,276.97 v1(1050,316.5) ; v1(1158.5,289.5) 1186.41,289.5 1200.11,303.2 R3.1 ; v1(1208,180) v1(1208,180) 1208.05,229.95 C4.2 ; v1(1333.5,184) 1333.5,227.64 1337.97,232.11 U2.8 ; U2.4@1499.04,313.36 1503.52,308.89 U2.4 1518,309.79 v1(1518,356) ; C3.2 1640.25,415.25 1640.25,464.25 v1(1641,465) ; v1(1764,439) 1764.25,439.25 1764.25,496.75 v1(1764.5,497) 1814,497 1814.5,496.5 v1(1814.5,439.5) ; v1(1901,176.5) 1901,142.75 1915.81,127.94 R6.1 ; BATT.2 2424.39,256.48 2424.39,320.39 v1(2427,323)
  other v1: 59.5,250.5 2101.5,361 1763.5,362.5 1815.5,362 2166,362.5 2232,364 2230,432.5 2101.5,433.5 2168.5,433.5 37,447
NetC1_1: C1.1 C3.1 L1.1 PWR.2@2372.76,605 PWR.2@2467.24,605 R4.2 U1.3 U2.3 | length 1514.8
  Top Layer w10: R4.2 C3.1 1564.7,373.02 1583.04,354.68 1583.04,314.68 1600.77,296.94 L1.1 ; U2.3 1605.85,283.3 L1.1 ; U1.3@2042.31,539.9 U1.3 ; v1(2084,657.5) 2081.69,659.81 2057.19,659.81 1994.5,722.5 1687.36,722.5 1681.5,716.64 1681.5,375.92 1655.96,350.38 1655.96,314.68 1638.23,296.94 L1.1 ; v1(2152,598.5) 2152,549.56 C1.1 ; v1(2217,597.5) 2365.26,597.5 2372.76,605 PWR.2@2467.24,605
  other v1: 2085,598.5 2152,657.5 2220,657.5
NetJ1_1: BATT.1 PWR.1@2372.76,506.57 PWR.1@2467.24,506.57 | length 362.9
  Top Layer w10: BATT.1 2372.76,283.58 2372.76,506.57 PWR.1@2467.24,506.57
NetL1_2: L1.2 U2.1 | length 105.7
  Top Layer w10: U2.1 1611.44,232.11 L1.2
NetLED1_1: CHG.1 U1.1 | length 396.8
  Top Layer w10: U1.1 2051.17,263.74 2186.56,128.34 CHG.1
NetLED1_2: CHG.2 R1.2 | length 136.1
  Top Layer w10: R1.2 2185.4,50.76 CHG.2
NetLED2_1: PWR.1@1795,49.66 R6.2 | length 125.4
  Top Layer w10: PWR.1@1795,49.66 1915.6,49.66 R6.2
NetR2_2: R2.2 U1.5 | length 69.1
  Top Layer w10: U1.5 1946.83,401.04 R2.2
NetR3_2: R3.2 R5.1 U2.5 | length 313.1
  Top Layer w10: R3.2 1277.77,308.89 U2.5 1342.65,308.14 1368.92,308.14 1390.98,286.08 1390.98,141.34 1415.48,116.84 R5.1
NetR4_1: R4.1 U2.2 | length 210.3
  Top Layer w10: R4.1 1435.02,404.5 1435.02,313.51 1490.08,258.45 1516.35,258.45 U2.2
pads on no net: IN.A2 IN.A3 IN.A6 IN.A7 IN.A8 IN.A10 IN.A11 IN.B2 IN.B3 IN.B6 IN.B7 IN.B8 IN.B10 IN.B11 IN.Shell OUT.A2 OUT.A3 OUT.A8 OUT.A10 OUT.A11 OUT.B2 OUT.B3 OUT.B8 OUT.B10 OUT.B11 OUT.Shell PWR. PWR.3 U2.6

## Polygon pours and split planes (outlines as drawn)
GND on Top Layer "GND" (solid, remove dead copper, pour order 15): 0,800 0,0 2501,0 2500.5,0.5 2500.5,799.5
GND on Top Layer "GND" (solid, remove dead copper, pour order 8): 2254,518.5 2254,340.5 2082.5,340.5 2082.5,518.5 1743,518.5 1743,340.5 1916,340.5 1916,485.5 2086,485.5 2060,485.5 2082.5,485.5 2082.5,518.5
5VIN on Top Layer "5VIN" (solid, remove dead copper, pour order 0): 1966.17,530.29 1743,530.29 1743,692.5 1966.17,692.5
NetC1_1 on Top Layer "NetC1_1" (solid, remove dead copper, pour order 1): 2255,529.5 2032,529.5 2032,692.5 2255,692.5
GND on Bottom Layer "GND" (solid, remove dead copper, pour order 12): 1740.5,519 1787,519 1787,472 1740.5,472
GND on Bottom Layer "GND" (solid, remove dead copper, pour order 14): 0,800.5 0,0 2499.5,0 2501,1.5 2501,800.5
NetC1_1 on Bottom Layer "NetC1_1" (solid, remove dead copper, pour order 13): 2057,685 2251.5,685 2251.5,567.5 2056.5,567.5
5VIN on Bottom Layer "5VIN" (solid, remove dead copper, pour order 11): 1815.5,681 1936.5,681 1936.5,569.5 1816,569.5

## Text inside footprints (layer, text, board x,y; h text height)
IN: Assembly Notes "PCB Edge" at 379.82,839.23 h24 r180
OUT: Assembly Notes "PCB Edge" at 888.82,838.23 h24 r180